# Altium PCB STM32F030F4_RF433_TRIAC_LEARN_CODE.PcbDoc
Units mil, origin at the board's own origin, x right, y up, seen from the top; angles counter-clockwise.
Board outline 2650 x 1600 mil, 2 copper layers (Top Layer, Bottom Layer); 36 components, 33 nets, 125 pads, 0 vias.
Unrouted connection lines stored in the file: 27.
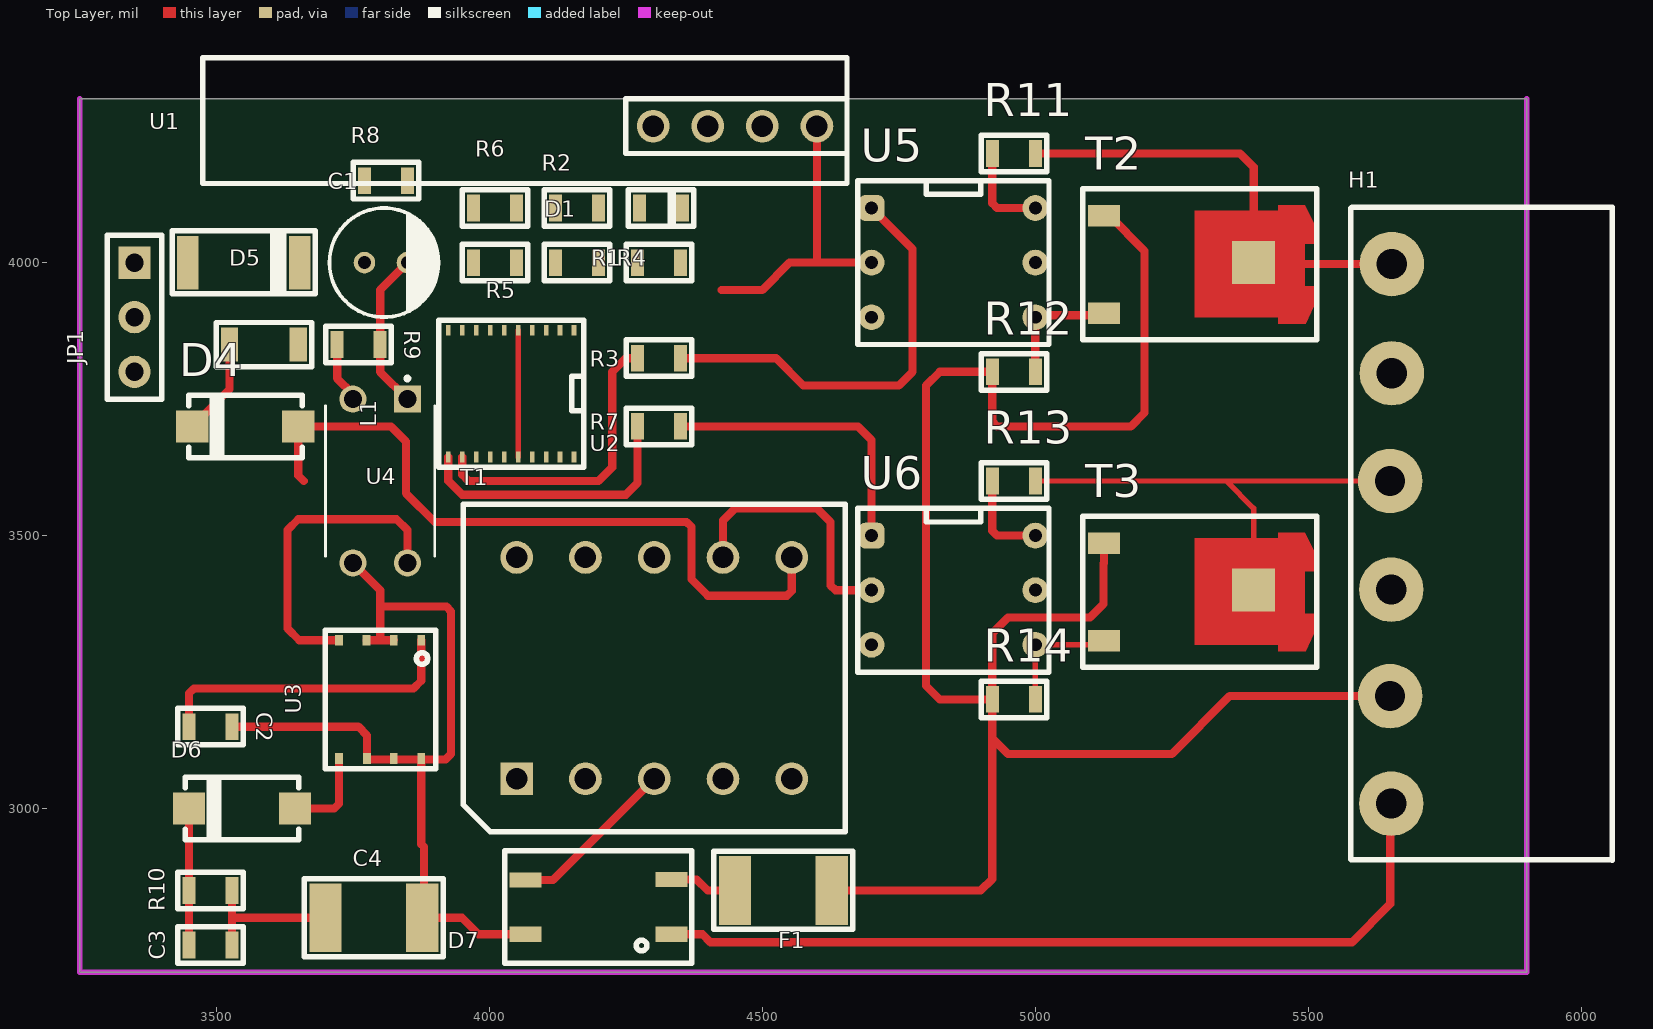
[diagram p0: Top Layer view]
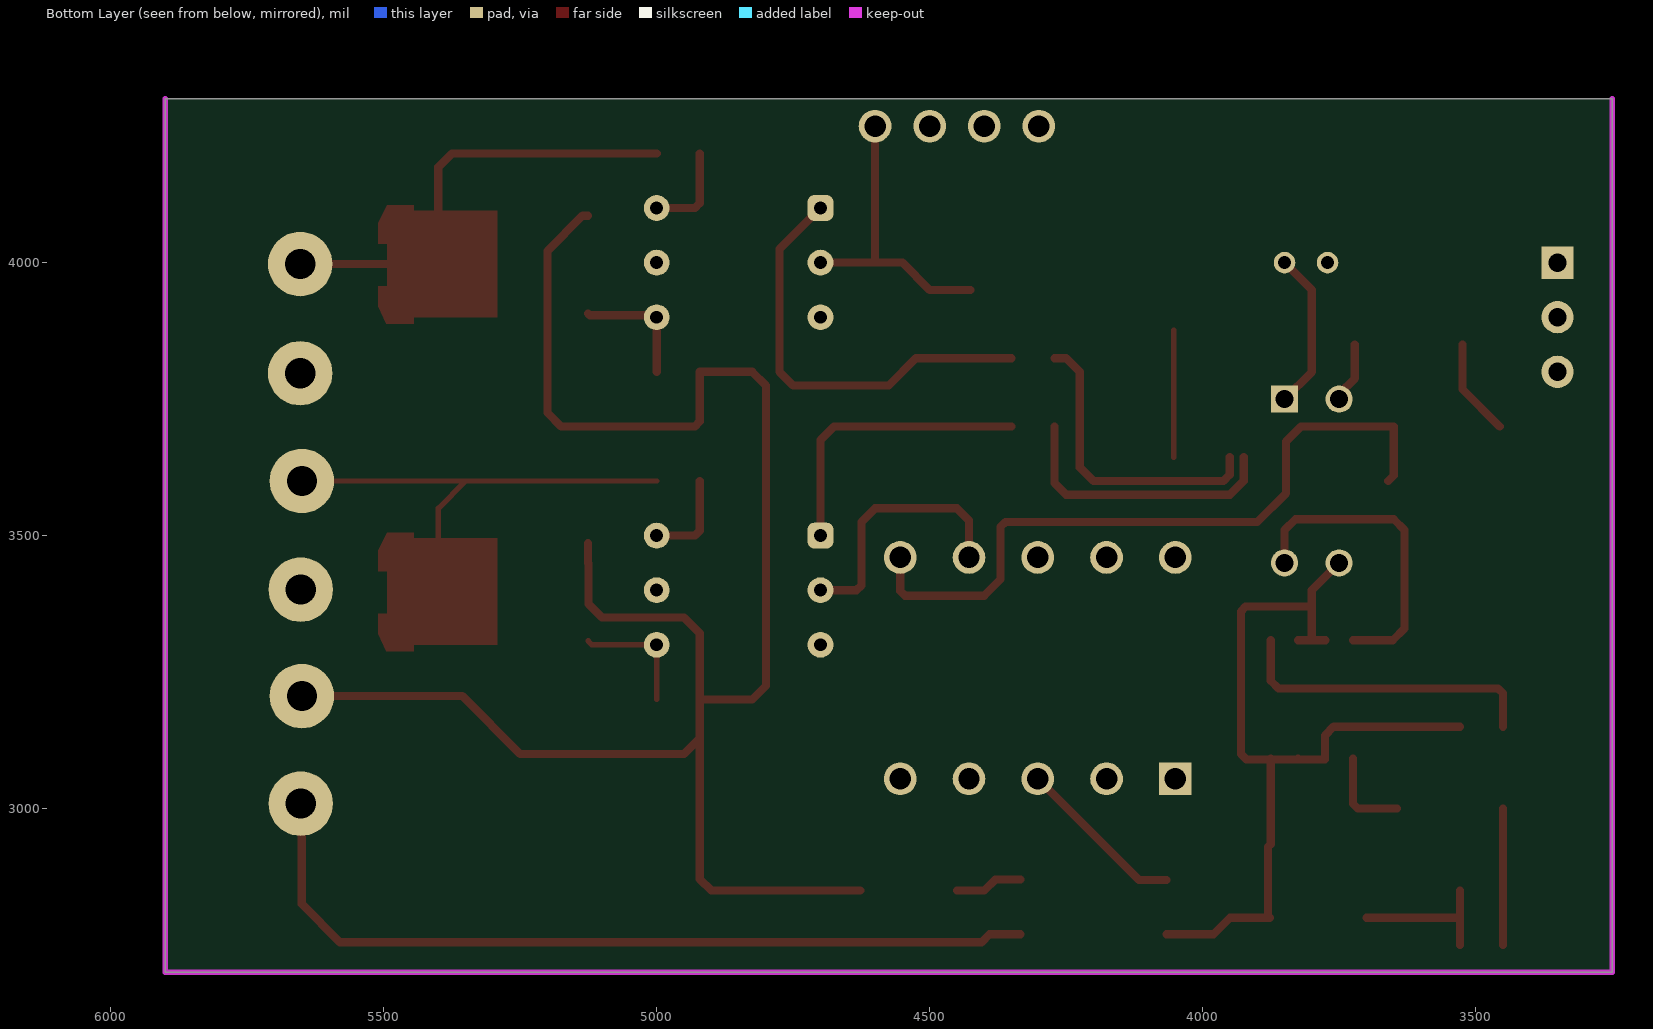
[diagram p1: Bottom Layer view, seen from below]

## Layer stack, top to bottom
Top Solder: solder mask 0.4, Solder Resist, Dk 3.5
Top Layer: signal copper 1.4
Dielectric 1: dielectric 12.6, FR-4, Dk 4.8
Bottom Layer: signal copper 1.4
Bottom Solder: solder mask 0.4, Solder Resist, Dk 3.5

## Board outline
3250,2700 5900,2700 5900,4300 3250,4300

## Design rules (kind name [scope] priority, off if disabled: settings)
Clearance [All] p1: gap=10 ignorepadtopadclearanceinfootprint=FALSE except(0: Arc-Hole Track-Hole SMDPad-Hole THPad-Hole Via-Hole Fill-Hole Poly-Hole Region-Hole Text-Hole)
PolygonConnect [All] p1: connectstyle=Relief reliefconductorwidth=10 reliefentries=4 polygonreliefangle="90 Angle" airgapwidth=10
RoutingVias [All] p1: holewidth=28 width=50 viastyle="Through Hole" minholewidth=28 minwidth=50 maxholewidth=28 maxwidth=50
SolderMaskExpansion [All] p1: expansion=4 istentingtop=FALSE
Width [All] p1: maxlimit=50 minlimit=10 preferedwidth=25
30 further rules are at their usual default settings.

## Components (designator, comment, footprint, x,y, rotation, side; value= is the part's Value field where it differs from the comment)
C1 "1000uF" CAP_RAD_4mm 3810.63,4000 r0 top
C2 "104" C0805 3489.38,3150.01 r180 top
C3 "400V-472M" C0805 3489.36,2749.99 r0 top
C4 "0.01uF 1KV" C1812 3788.58,2800 r180 top
D1 "LED0805" L0805RED 4314.37,4075.4 r0 top
D4 "SB540" DO-214AC(SMA) 3475.59,3700 r0 top
D5 "1N5229B" DO-213AB 3550,4000 r0 top
D6 "US1A" DO-214AC(SMA) 3469.68,3000 r0 top
D7 "MB2S" TO-269AA 4200,2820 r180 top
F1 "1A" FUSE1812 4538.58,2850 r180 top
H1 "Header Big 6" "HEADER BIG 6" 5818.31,3507.26 r270 top
JP1 "Header 3x1 TH Pitch 2.54mm" "Header 3x1 TH Pitch 2.54mm" 3350,3900 r270 top
L1 "10uH" INDUCTOR_1206 3587.01,3750 r0 top
R1 "10k" R0805 4350,4000 r0 top
R2 "10k" R0805 4200,4100 r0 top
R3 "10k" R0805 4350,3825 r0 top
R4 "10k" R0805 4121.26,4000 r180 top
R5 "2K2" R0805 4050,4000 r0 top
R6 "1K" R0805 4050,4100 r0 top
R7 "10k" R0805 4350,3700 r0 top
R8 "1K" R0805 3771.26,4150 r180 top
R9 "68" R0805 3800,3850 r0 top
R10 "150K" R0805 3528.74,2850 r0 top
R11 "360" R0805 5000,4200 r0 top
R12 "330" R0805 5000,3800 r0 top
R13 "360" R0805 5000,3600 r0 top
R14 "330" R0805 5000,3200 r0 top
T1 "TRANSFORMER_EE16A" TRANSFORMER_EE16A 4301.97,3257.24 r90 top
T2 "BT137S" TO252-3 5305.51,3996.06 r270 top
T3 "BT137S" TO252-3 5305.51,3396.06 r270 top
U1 "RF433_315_RECEVICE" RF433_315_RECEVICE 4100,4250 r0 top
U2 "STM32F030F4" TSSOP20_0.65_4.4 4040,3760 r270 top
U3 "TNY253" SOIC08_1.27_6.0 3800,3200 r270 top
U4 "PC817" DIP4 3800,3600 r270 top
U5 "NC" DIP6_White 5000,4000 r270 top
U6 "NC" DIP6_White 5000,3400 r270 top

## Footprints (in the part's own frame and the unit in brackets; to place one, negate y for a bottom-side part, rotate by r counter-clockwise, add the part's x,y. Pads: shape width x height; smd on the part's side, far side on the other; paste and mask are expansions set on the pad)
C0805 [mm]
  rect 0.6x1.24 smd: 1(-1,0) 2(1,0)
  silkscreen extent -1.52,-0.85 1.53,0.85, body extent -1,-0.6 1,0.6, height 1
C1812 [mm]
  rect 1.5x3.2 smd: 1(-2.25,0) 2(2.25,0)
  silkscreen extent -3.22,-1.82 3.23,1.81, body extent -2.25,-1.6 2.25,1.6, height 0.97
CAP_RAD_4mm [mm]
  round 1 hole 0.6: 1(-1,0) 2(1,0)
  silkscreen extent -2.63,-2.54 2.51,2.54, body extent -2.53,-2.53 2.52,2.53, height 7.29
DIP4 [mm]
  rect 1.26x1.26 hole 0.84: 1(-3.81,1.27)
  round 1.26 hole 0.84: 2(-3.81,-1.27) 3(3.81,-1.27) 4(3.81,1.27)
  silkscreen extent -4.86,-2.54 3.5,2.54, body extent -3.94,-2.29 3.94,2.3, height 4.3
DIP6_White [mm]
  rrect50% 1.2x1.2 hole 0.6: 1(-2.54,-7.62)
  round 1.2 hole 0.6: 2(0,-7.62) 3(2.54,-7.62) 4(2.54,0) 5(0,0) 6(-2.54,0)
  silkscreen extent -3.81,-8.25 3.81,0.64, body extent -3.55,-7.75 3.57,0.13, height 5.3
DO-213AB [mm]
  rect 1x2.5 smd: 1(-2.6,0) 2(2.6,0)
  silkscreen extent -3.32,-1.48 3.32,1.48, body extent -2.6,-1.3 2.6,1.3, height 2.64
DO-214AC(SMA) [mm]
  rect 1.5x1.5 smd: 1(4.43,0) 2(-0.5,0)
  silkscreen extent -0.67,-1.5 4.61,1.5, body extent -0.67,-1.46 4.61,1.46, height 2.41
FUSE1812 [mm]
  rect 1.5x3.2 smd: 1(-2.25,0) 2(2.25,0)
  silkscreen extent -3.22,-1.82 3.23,1.81, body extent -2.37,-1.74 2.37,1.74, height 1.03
"Header 3x1 TH Pitch 2.54mm" [mm]
  rect 1.5x1.5 hole 0.85: 1(-2.54,0)
  round 1.5 hole 0.85: 2(0,0) 3(2.54,0)
  silkscreen extent -3.81,-1.27 3.81,1.27, body extent -3.81,-1.27 3.81,1.27, height 8.89
"HEADER BIG 6" [mm]
  round 3 hole 1.4: 1(-12.45,-4.2) 2(-7.37,-4.2) 3(-2.356,-4.275) 4(2.699,-4.224) 5(7.652,-4.275) 6(12.656,-4.224)
  silkscreen extent -15.1,-6.1 15.28,6.05, body extent -14.87,-5.95 15.13,6.05, height 3.15
INDUCTOR_1206 [mm]
  rect 0.8x1.6 smd: 1(-1.6,2.54) 2(1.6,2.54)
  silkscreen extent -2.23,1.52 2.22,3.56, body extent -1.6,1.74 1.6,3.34, height 1.1
L0805RED [mm]
  rect 0.6x1.24 smd: 1(-1,0.625) 2(1,0.625)
  silkscreen extent -1.53,-0.23 1.52,1.47, body extent -1,0 1,1.25, height 1.1
R0805 [mm]
  rect 0.6x1.24 smd: 1(-2,0) 2(0,0)
  silkscreen extent -2.52,-0.85 0.53,0.85, body extent -2,-0.62 0,0.62, height 0.45
RF433_315_RECEVICE [mil]
  round 60 hole 39.37: 1(200,0) 2(300,0) 3(400,0) 4(500,0)
  silkscreen extent -625,-105 555,125, body extent -626,-105 555,167, height 472
SOIC08_1.27_6.0 [mm]
  rect 0.5x0.36 smd: 1(-2.75,1.913) 2(-2.75,0.637) 3(-2.75,-0.637) 4(-2.75,-1.913) 5(2.75,-1.913) 6(2.75,-0.613) 7(2.75,0.637) 8(2.75,1.913)
  silkscreen extent -3.22,-2.55 3.22,2.58, body extent -3,-2.45 3,2.45, height 1.75
TO252-3 [mm]
  rect 1x1.5 smd: 1(-2.284,-4.568) 3(2.262,-4.568)
  rect 2x2 smd: 2(-0.1,2.4)
  Top Layer region: -1.954,5.186 -2.767,4.779 -2.767,3.535 -2.513,3.535 -2.513,-0.351 2.44,-0.351 2.44,3.535 2.745,3.535 2.745,4.814 1.932,5.186 0.992,5.186 0.992,4.779 -0.989,4.779 -0.989,5.186
  silkscreen extent -3.53,-5.56 3.48,5.33, body extent -3.39,-4.93 3.34,5.17, height 2.37
TO-269AA [mm]
  rect 1.5x0.7 smd: 1(-3.4,1.275) 2(-3.4,-1.275) 3(3.4,-1.25) 4(3.4,1.275)
  silkscreen extent -4.34,-2.62 4.37,2.62, body extent -3.52,-2.47 3.52,2.47, height 2.7
TRANSFORMER_EE16A [mm]
  rect 1.524x1.524 hole 1: 1(-5.15,6.4)
  round 1.524 hole 1: 2(-5.15,3.2) 3(-5.15,0) 4(-5.15,-3.2) 5(-5.15,-6.4) 6(5.15,-6.4) 7(5.15,-3.2) 8(5.15,0) 9(5.15,3.2) 10(5.15,6.4)
  silkscreen extent -7.62,-8.89 7.62,8.89
TSSOP20_0.65_4.4 [mm]
  rect 0.5x0.22 smd: 1(-2.95,2.925) 2(-2.95,2.275) 3(-2.95,1.625) 4(-2.95,0.975) 5(-2.95,0.325) 6(-2.95,-0.325) 7(-2.95,-0.975) 8(-2.95,-1.625) 9(-2.95,-2.275) 10(-2.95,-2.925) 11(2.95,-2.925) 12(2.95,-2.275) 13(2.95,-1.625) 14(2.95,-0.975) 15(2.95,-0.325) 16(2.95,0.325) 17(2.95,0.975) 18(2.95,1.625) 19(2.95,2.275) 20(2.95,2.925)
  silkscreen extent -3.42,-3.38 3.42,3.38, body extent -3.14,-3.25 3.14,3.25, height 1.09

## Part data
C1: library part Capacitor(Radian)
C2 C3: library part C0805
C4: library part Capacitors(SMD)
D4: library part "Diode Schottky"
D5: library part "Diode Zener"
D6: library part US1A-US1M
D7: library part "Diode MB2S"
F1: library part Fuse
L1: library part Inductor
R1 R2 R3 R4 R5 R6 R7 R8 R9 R10 R11 R12 R13 R14: library part "Resistor SMD"
T2 T3: library part "BT137S-600E(8A 600V)"
U1: library part RF433_315
U2: "4Kbyte RAM and 16Kb FLASH"
U5 U6: library part MOC3041

## Nets (pads, with @x,y where several pads share a name; then routed paths per layer and width w, separated by ;. In a path a pad name is that pad's centre, name@x,y a point inside that pad or via, vN(x,y) a via of type N, cw(c..) or ccw(c..) an arc to the next point about the centre after c; other vN are vias at no path point)
+3.3V: R4.2 R8.1 U2.5 U2.16 | length 232.3
  Top Layer w10: U2.16 U2.5
+5: L1.2 U1.1
GND: C1.1 D1.2 D5.1 JP1.3 R2.1 R6.1 T1.7 U1.4 U2.15 U5.2 U6.2 | length 1025.1
  Top Layer w15: 4425,3950 4500,3950 4550,4000 4600,4000 ; T1.7 4427.95,3527.95 4450,3550 4600,3550 4625,3525 4625,3408.79 4633.79,3400 U6.2 ; U1.4 4600,4000 ; U5.2 4600,4000
NetC1_2: C1.2 D4.2 L1.1 R9.2 U4.1 | length 469.6
  Top Layer w15: D4.2 3524.02,3768.11 L1.1 ; U4.1 3800,3800 R9.2 3800,3950 C1.2
NetC2_1: C2.1 C4.1 D7.4 U3.2 U3.3 U3.6 U3.7 U3.8 U4.3 | length 1562.2
  Top Layer w15: C2.1 3760,3150 3775.89,3134.11 3775.89,3090.41 3776.3,3090 3824.68,3090 3825.1,3090.41 U3.7 3826.83,3090 3874.88,3090 U3.8@3875.3,3090.41 ; U4.3 3800,3400 3800,3370 ; U3.3 3800,3308.27 ; U3.2 3800,3308.27 ; U3.8 U3.8@3875.3,3090.41 ; D7.4 3980.2,2769.8 3950,2800 C4.1 3880,2802.83 3880,2930 3875.3,2934.7 U3.8@3875.3,3090.41 ; 3800,3308.27 3800,3370 ; 3800,3370 3921.21,3370 3930,3361.21 3930,3100 3920,3090 3875.71,3090 U3.8@3875.3,3090.41
NetC2_2: C2.2 U3.1 | length 570.2
  Top Layer w15: C2.2 3450,3211.21 3458.79,3220 3861.21,3220 3875.3,3234.08 U3.1
NetC3_1: C3.1 D6.2 R10.1 | length 250
  Top Layer w15: C3.1 R10.1 D6.2
NetC3_2: C3.2 C4.2 D7.3 R10.2 T1.3 | length 583.8
  Top Layer w15: C3.2 3528.74,2800 ; R10.2 3528.74,2800 ; C4.2 3528.74,2800 ; D7.3 4116.69,2869.21 T1.3
NetD1_1: D1.1 R1.2
NetD4_1: D4.1 T1.6 | length 1313.3
  Top Layer w15: 3660,3600 3650,3610 D4.1 3820,3700 3847.5,3672.5 3847.5,3577.5 3900,3525 4361.21,3525 4370,3516.21 4370,3420 4400,3390 4545.15,3390 4553.94,3398.79 T1.6
NetD5_2: D5.2 R9.1 U4.2 | length 111.9
  Top Layer w15: R9.1 3721.26,3788.1 3750,3759.36 U4.2
NetD6_1: D6.1 T1.5 U3.5 | length 167.2
  Top Layer w15: D6.1 3715.92,3000 3724.7,3008.79 U3.5
NetD7_1: D7.1 H1.2 H1.4 H1.6 | length 1536.1
  Top Layer w15: D7.1 4390.2,2769.8 4405,2755 5580,2755 5650,2825 5650,3007 H1.6
NetD7_2: D7.2 F1.2 | length 124.5
  Top Layer w15: D7.2 4379.8,2870.2 4400,2850 F1.2
NetF1_1: F1.1 H1.5 R12.1 R14.1 T2.1 T3.1 | length 3469.5
  Top Layer w15: F1.1 4900,2850 4921.26,2871.26 4921.26,3128.74 ; T3.1 5125.68,3450 5125,3449.32 5125,3375 5100,3350 4950,3350 4921.26,3321.26 R14.1 ; T2.1 5135.52,4086 5200,4021.52 5200,3725 5175,3700 4930.05,3700 4921.26,3708.79 R12.1 4825,3800 4800,3775 4800,3225 4825,3200 R14.1 ; H1.5 5356,3206 5250,3100 4950,3100 4921.26,3128.74 ; 4921.26,3128.74 R14.1
NetH1_1: H1.1 R11.2 T2.2 | length 839.4
  Top Layer w15: R11.2 5375,4200 5400,4175 T2.2 5402.58,3997.42 H1.1
NetH1_3: H1.3 R13.2 T3.2 | length 870.7
  Top Layer w10: R13.2 5350,3600 ; T3.2 5400,3550 5350,3600 ; H1.3 5350,3600
NetJP1_1: JP1.1 R8.2
NetJP1_2: JP1.2 U2.9
NetR1_1: R1.1 U2.13
NetR2_2: R2.2 U2.1
NetR3_1: R3.1 U2.12 | length 553.6
  Top Layer w15: U2.12 3950.43,3611.52 3961.95,3600 4200,3600 4225,3625 4225,3800 4250,3825 R3.1
NetR3_2: R3.2 U5.1 | length 787.1
  Top Layer w15: R3.2 4525,3825 4575,3775 4750,3775 4775,3800 4775,4025 U5.1
NetR4_1: R4.1 U2.4
NetR5_1: R5.1 R6.2 U2.7
NetR5_2: R5.2 U1.2 U1.3
NetR7_1: R7.1 U2.11 | length 513.1
  Top Layer w15: U2.11 3924.84,3600.16 3950,3575 4250,3575 4271.26,3596.26 R7.1
NetR7_2: R7.2 U6.1 | length 535.4
  Top Layer w15: R7.2 4675,3700 4700,3675 U6.1
NetR11_1: R11.1 U5.6 | length 173.6
  Top Layer w15: R11.1 4921.26,4108.79 4930.05,4100 U5.6
NetR12_2: R12.2 T2.3 U5.4 | length 228.6
  Top Layer w15: R12.2 U5.4 5003.5,3903.5 5122.18,3903.5 T2.3
NetR13_1: R13.1 U6.6 | length 173.6
  Top Layer w15: R13.1 4921.26,3508.79 4930.05,3500 U6.6
NetR14_2: R14.2 T3.3 U6.4 | length 228.6
  Top Layer w10: R14.2 U6.4 5118.68,3300 T3.3
NetU3_4: U3.4 U4.4 | length 580.3
  Top Layer w15: U3.4 3651.73,3308.27 3630,3330 3630,3510 3650,3530 3830,3530 3850,3510 U4.4
pads on no net: T1.1 T1.2 T1.4 T1.8 T1.9 T1.10 U2.2 U2.3 U2.6 U2.8 U2.10 U2.14 U2.17 U2.18 U2.19 U2.20 U5.3 U5.5 U6.3 U6.5

## Keep-outs
Keep-Out Layer:
  lines w9.84: 3250,4300 3250,2700 5900,2700 5900,4300